# Altium PCB PCB.PcbDoc
Units mil, origin at the board's own origin, x right, y up, seen from the top; angles counter-clockwise.
Board outline 2115 x 1365 mil, 4 copper layers (Top Layer, Layer 1, Layer 2, Bottom Layer), stack 59.391 mil thick; 38 components, 21 nets, 114 pads, 51 vias.
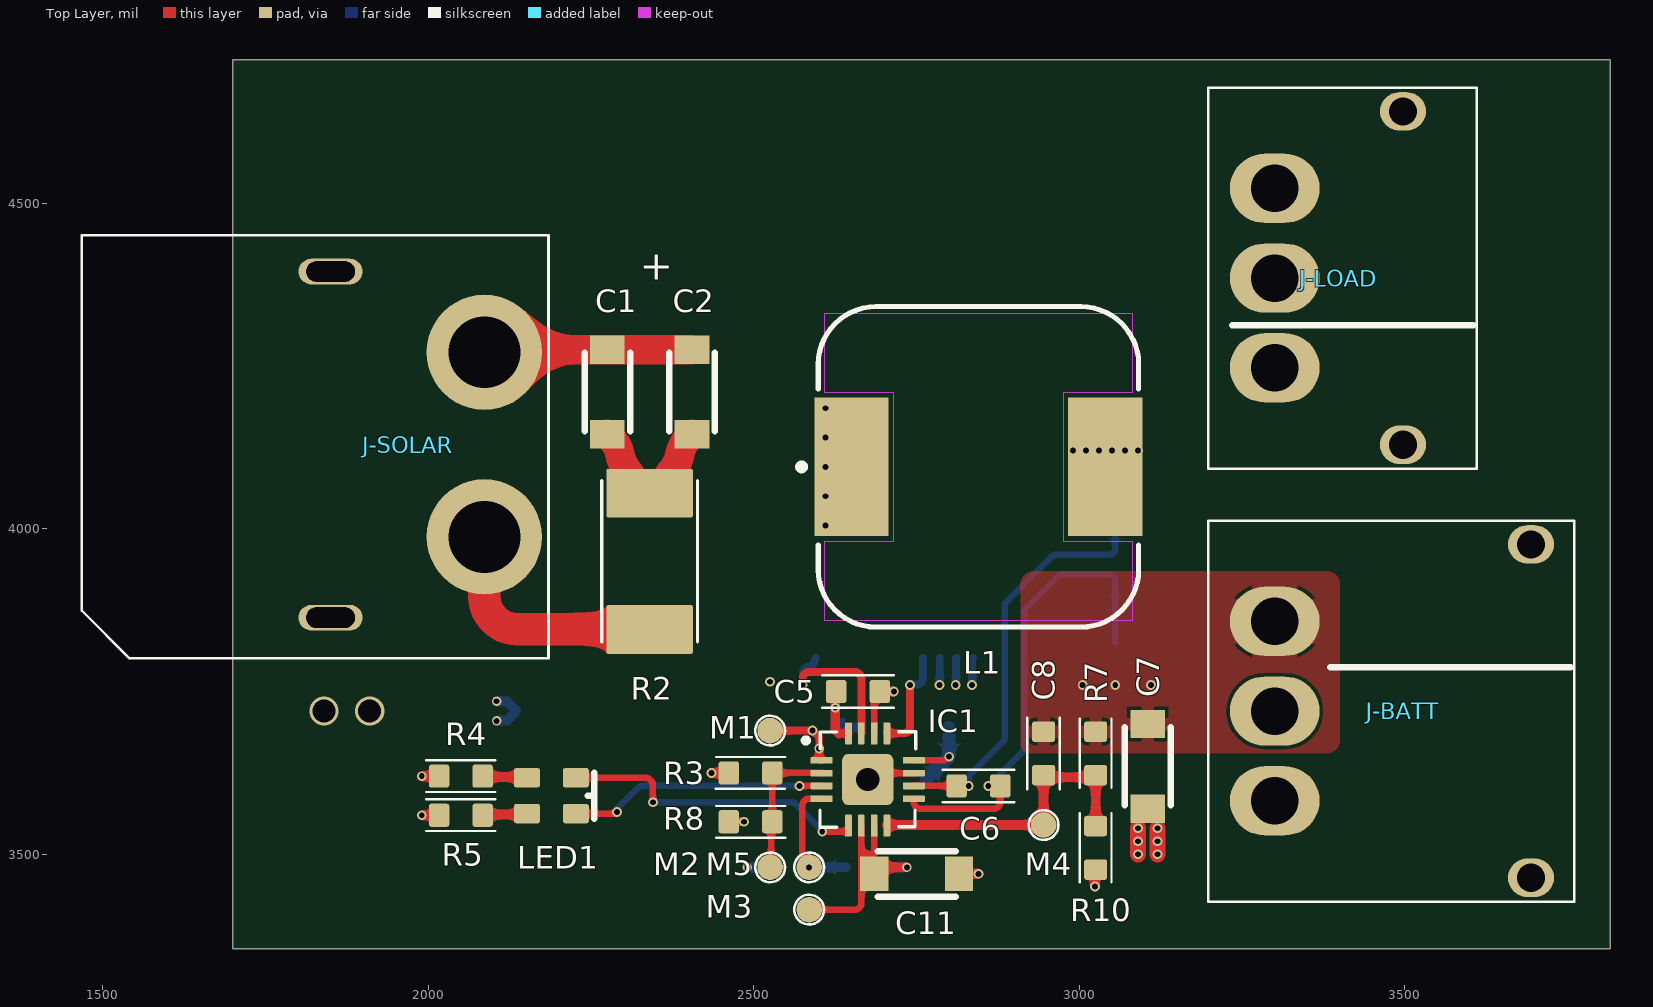
[diagram p0: Top Layer view]
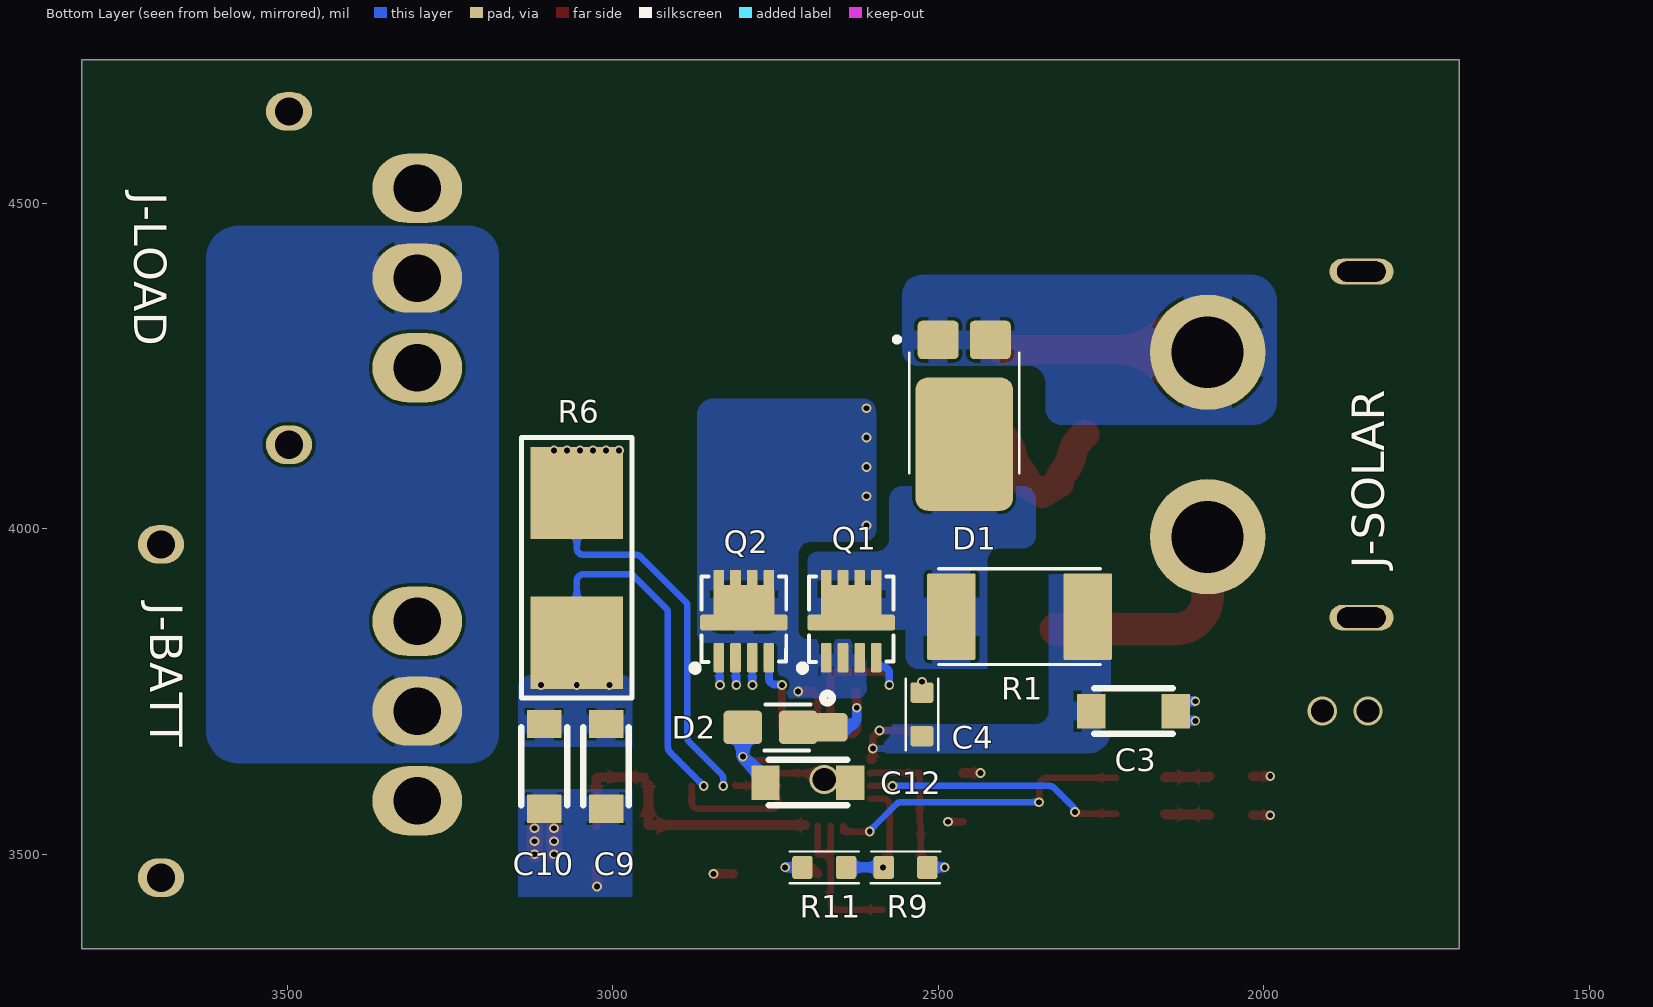
[diagram p1: Bottom Layer view, seen from below]
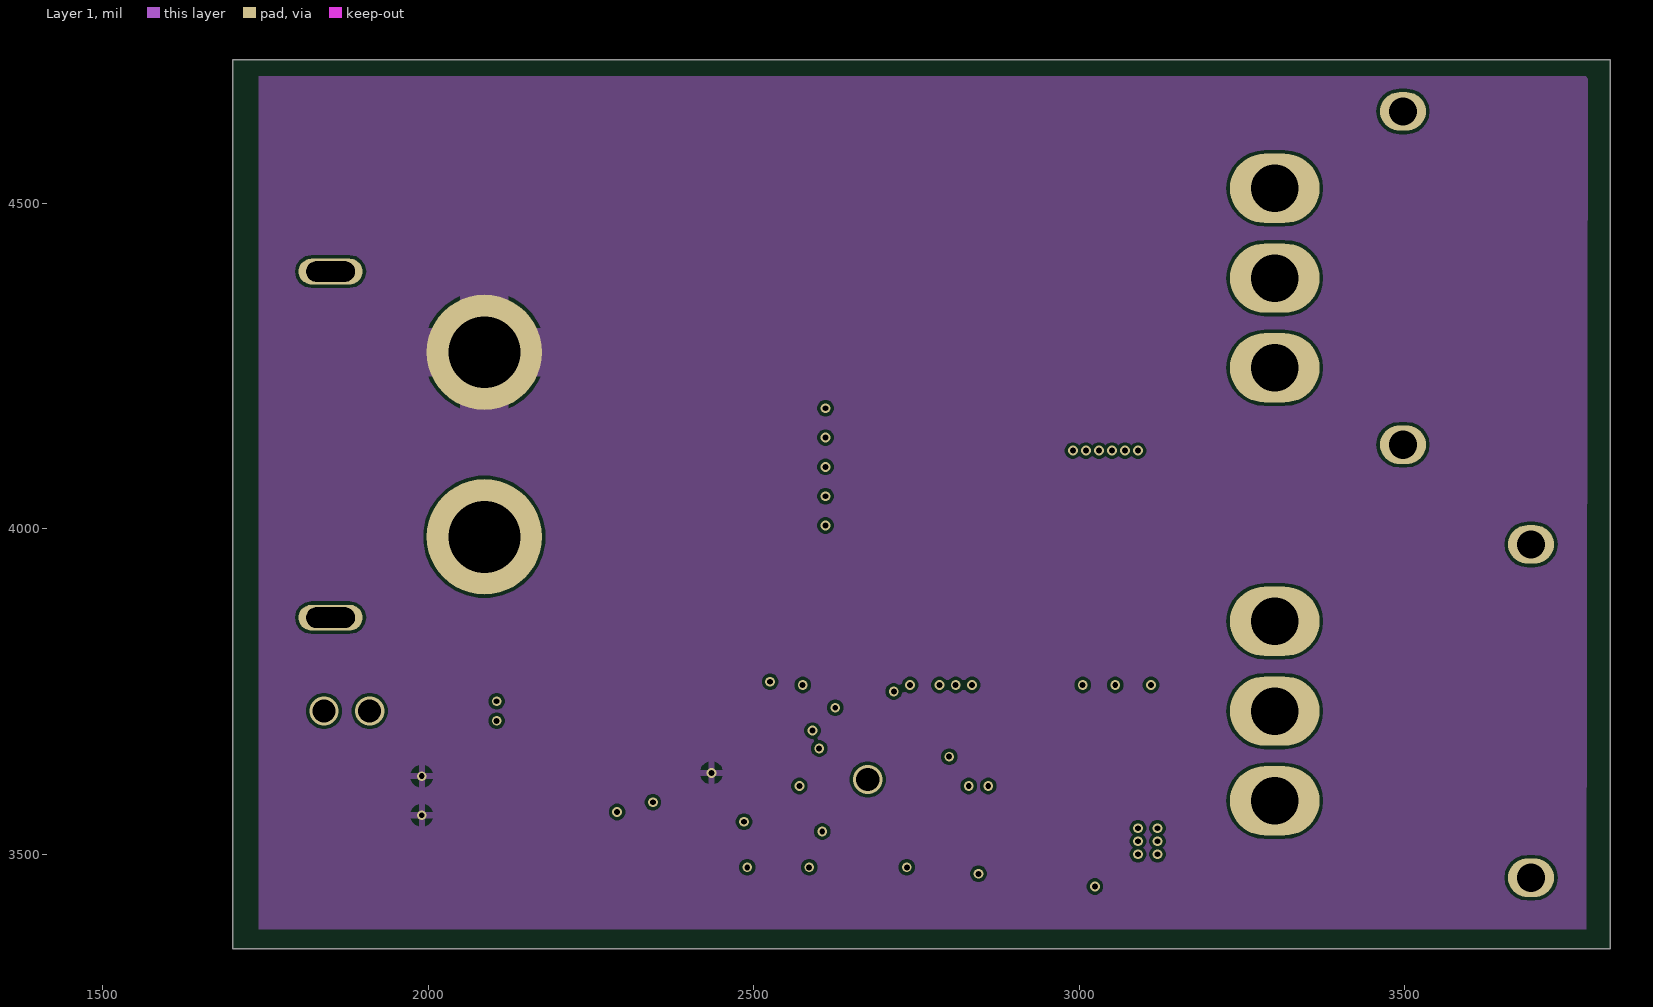
[diagram p2: Layer 1]
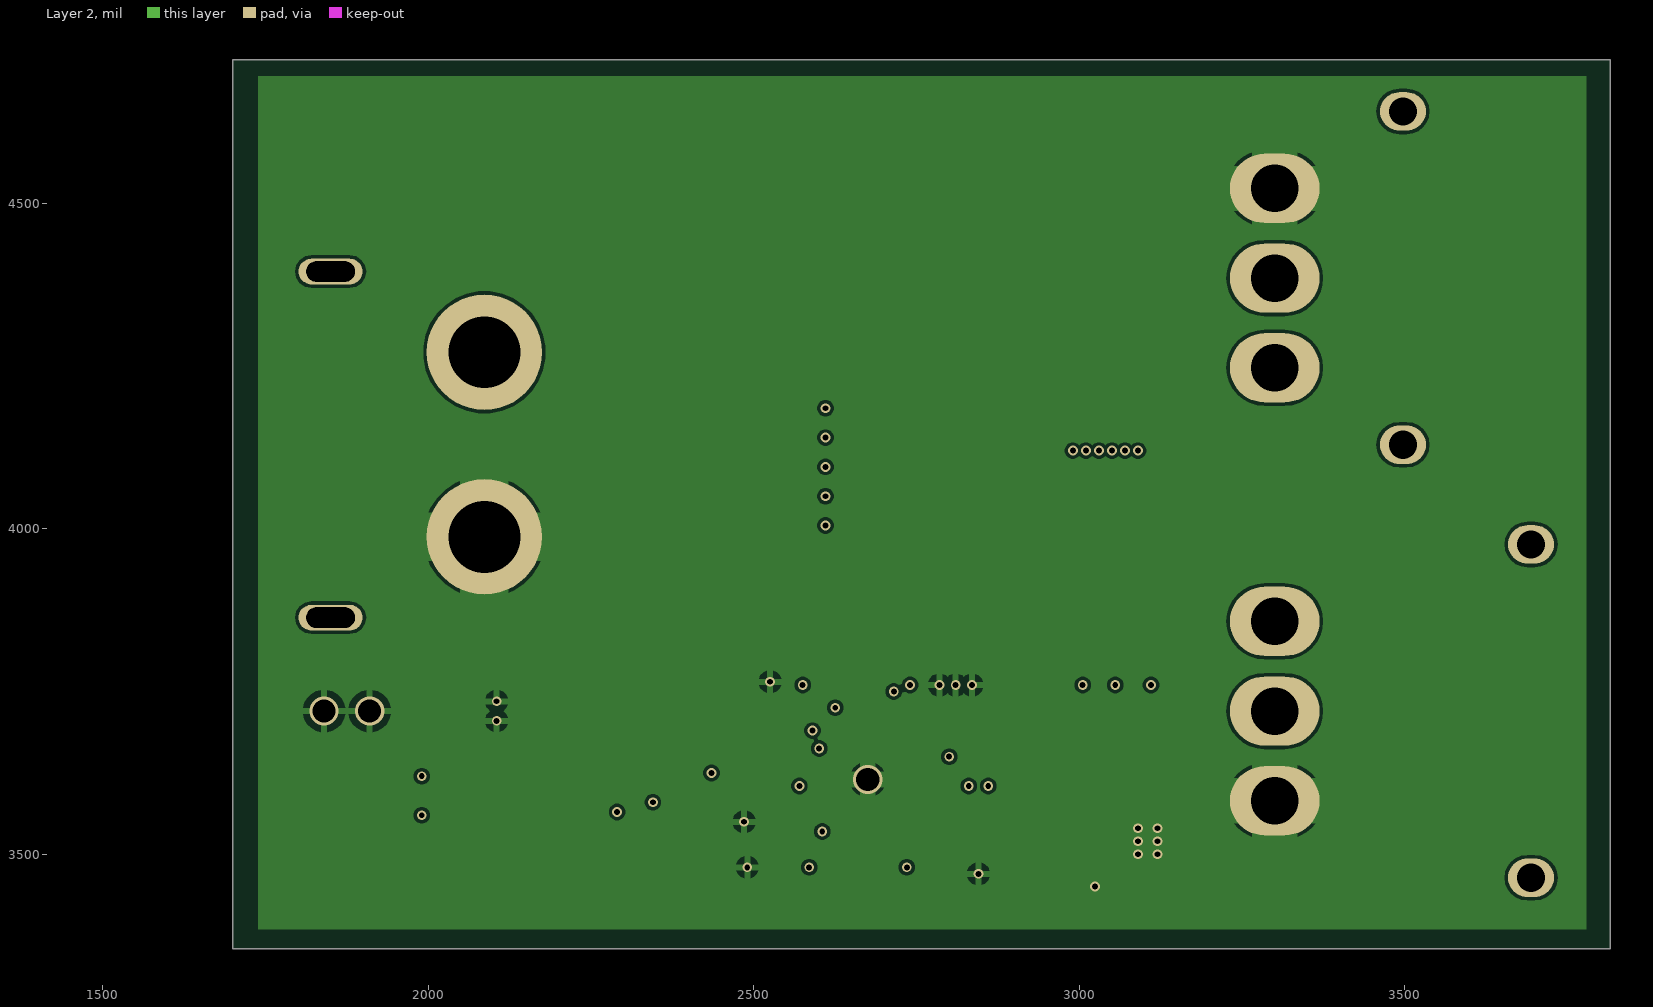
[diagram p3: Layer 2]

## Layer stack, top to bottom
Top Solder: solder mask 0.4, Solder Resist, Dk 3.5
Top Layer: signal copper 0.7087
Dielectric 2: prepreg 2.6823, Prepreg-1080, Dk 4.3
Dielectric 4: prepreg 2.6823, Prepreg-1080, Dk 4.3
Layer 1: signal copper 1.378
Dielectric 1: core 44.4882, FR4-CORE, Dk 4.6
Layer 2: signal copper 1.378
Dielectric 5: prepreg 2.6823, Prepreg-1080, Dk 4.3
Dielectric 3: prepreg 2.6823, Prepreg-1080, Dk 4.3
Bottom Layer: signal copper 0.7087
Bottom Solder: solder mask 0.4, Solder Resist, Dk 3.5

## Board outline
1700,3355 3815,3355 3815,4720 1700,4720

## Design rules (kind name [scope] priority, off if disabled: settings)
Clearance [All] p1: gap=4.92 ignorepadtopadclearanceinfootprint=FALSE
HoleSize [All] p1: absolutevalues=TRUE maxlimit=200 minlimit=7.87 maxpercent=80.000 minpercent=20.000
MinimumSolderMaskSliver [All] p1: minsoldermaskwidth=3
PolygonConnect [All] p1: connectstyle=Relief reliefconductorwidth=10 reliefentries=4 polygonreliefangle="90 Angle" airgapwidth=10
RoutingVias [All] p1: holewidth=28 width=50 viastyle="Through Hole" minholewidth=28 minwidth=50 maxholewidth=28 maxwidth=50
SilkToSolderMaskClearance [IsPad] p1: minsilkscreentomaskgap=3 clearancetoexposedcopper=TRUE
SolderMaskExpansion [All] p1: expansion=2 istentingtop=FALSE
Width [All] p1: maxlimit=70 minlimit=8 preferedwidth=12
27 further rules are at their usual default settings.

## Components (designator, comment, footprint, x,y, rotation, side; value= is the part's Value field where it differs from the comment)
C1 "C1206C105K5RACTU" C1206_medium 2275,4210 r270 top value=1u
C2 "C1206C105K5RACTU" C1206_medium 2405,4210 r270 top value=1u
C3 "C1206C105K5RACTU" C1206_medium 2200,3720 r0 bottom value=1u
C4 "06035C104K4Z2A" C0603 2525,3715 r270 bottom value=100n
C5 "06035C104K4Z2A" C0603 2660,3750 r0 top value=100n
C6 "06035C104K4Z2A" C0603 2845,3605 r0 top value=100n
C7 "C1206C105K5RACTU" C1206_medium 3105,3635 r90 top value=1u
C8 "CC0603JRNPO9BN220" C0603 2945,3655 r270 top value="22p NP0"
C9 "C1206C105K5RACTU" C1206_medium 3010,3635 r90 bottom value=1u
C10 "C1206C105K5RACTU" C1206_medium 3105,3635 r90 bottom value=1u
C11 "C1206C105K5RACTU" C1206_medium 2750,3470 r0 top value=1u
C12 "C1206C105K5RACTU" C1206_medium 2700,3610 r0 bottom value=1u
D1 "PMEG045V100EIPE-QZ" SOT1289 2465,4170 r180 bottom value=PMEG045V100E
D2 "NRVB0540T1G" SOD123HP 2735,3695 r180 bottom
IC1 "BQ24650" QFN50P350X350X100-17N 2674.88,3614.88 r0 top
J-BATT "MR30PW-M" MR30PW-M 3300,3582.2 r180 top
J-LOAD "MR30PW-FB" MR30PW-FB 3300,4247.2 r180 top
J-SOLAR "XT60-PCB-M" XT60-PCB-M 2086.22,4270.98 r0 top
L1 "10uH, 7.1A" WE-PD_1210 2845,4095 r270 top
LED1 "150080RV54050" LED-GREEN-RED 2190,3590 r270 top value="Green Red"
M1 "TP" "Pad 1mm SMD" 2525,3690 r0 top
M2 "TP" "Pad 1mm SMD" 2525,3480 r0 top
M3 "TP" "Pad 1mm SMD" 2585,3415 r0 top
M4 "TP" "Pad 1mm SMD" 2945,3545 r90 top
M5 "TP" "Pad 1mm SMD" 2585,3480 r90 top
Q1 "FDMC86102L" PowerPak1212_LFPAK33 2633.4,3861 r180 bottom
Q2 "FDMC86102L" PowerPak1212_LFPAK33 2798.4,3861 r180 bottom
R1 "352210RFT" RESC6331X70N 2375,3865 r180 bottom value=10R
R2 "352210RFT" RESC6331X70N 2340,3950 r270 top value=10R
R3 "CRGCQ0603F470K" R0603 2495,3625 r0 top value=470K
R4 "CRGP0603F10K" R0603 2050,3620 r0 top value=10K
R5 "CRGP0603F10K" R0603 2050,3560 r0 top value=10K
R6 "CS121WF250MT2E" Shunt_2512 3055,3940 r270 bottom value=0R025
R7 "SFR03EZPF5603" R0603 3025,3655 r270 top value=560K
R8 "CRGCQ0603F33K" R0603 2495,3550 r180 top value=33K
R9 "SFR03EZPF5101" R0603 2675,3480 r180 bottom value=5K1
R10 "RC0603FR-07100KL" R0603 3025,3510 r270 top value=100k
R11 "CRGCQ0603F33K" R0603 2550,3480 r180 bottom value=33K

## Footprints (in the part's own frame and the unit in brackets; to place one, negate y for a bottom-side part, rotate by r counter-clockwise, add the part's x,y. Pads: shape width x height; smd on the part's side, far side on the other; paste and mask are expansions set on the pad)
C0603 [mm]
  rrect25% 0.8x0.9 smd: 1(-0.85,0) 2(0.85,0)
  silkscreen extent -1.4,-0.64 1.4,0.64, body extent -0.8,-0.4 0.8,0.4, height 0.6
C1206_medium [mm]
  rect 1.1x1.35 smd: 1(-1.65,0) 2(1.65,0)
  silkscreen extent -1.52,-0.89 1.52,0.89, body extent -1.6,-0.8 1.6,0.8, height 1.26
LED-GREEN-RED [mil]
  rrect25% 30x40 smd mask+2: 1(27.56,36.69) 2(-27.56,36.69) 3(-27.56,-38.31) 4(27.56,-38.31)
  silkscreen extent -35,55 35,65, body extent -25,-39 25,39, height 18
MR30PW-FB [mm]
  oval 3.5x2.7 hole 1.85: 1(0,0) 2(0,-3.5) 3(0,-7)
  oval 1.8x1.5 hole 1.1: 5(-5,3) 5(-5,-10)
  silkscreen extent -7.87,-10.92 2.6,3.94, body extent -13.62,-11.13 0.83,4.27, height 5.3
MR30PW-M [mm]
  oval 3.5x2.7 hole 1.85: 1(0,-7) 2(0,-3.5) 3(0,0)
  oval 1.8x1.5 hole 1.1: 5(-10,3) 5(-10,-10)
  silkscreen extent -11.68,-10.92 2.6,3.94, body extent -12.95,-11.13 1,4.27, height 5.35
"Pad 1mm SMD" [mm]
  round 1 smd mask+0.051: 1(0,0)
  silkscreen extent -0.58,-0.58 0.58,0.58
PowerPak1212_LFPAK33 [mil]
  rrect25% 16.5x45 smd mask+2: 1(-38.4,-59) 2(-12.8,-59) 3(12.8,-59) 4(38.4,-59)
  rrect25% 16.5x34 smd mask+2: 5(-38.4,59) 5(-12.8,59) 5(12.8,59) 5(38.4,59)
  rrect25% 134x24 smd mask+2: 5(0,-5)
  rrect25% 93.31x69.29 smd mask+2: 5(0.01,17.78)
  silkscreen extent -77,-77 65,65, body extent -65,-65 65,65, height 44
QFN50P350X350X100-17N [mm]
  rrect25% 0.86x0.26 smd: 1(-1.8,0.75) 2(-1.8,0.25) 3(-1.8,-0.25) 4(-1.8,-0.75) 9(1.8,-0.75) 10(1.8,-0.25) 11(1.8,0.25) 12(1.8,0.75)
  rrect25% 0.26x0.86 smd: 5(-0.75,-1.8) 6(-0.25,-1.8) 7(0.25,-1.8) 8(0.75,-1.8) 13(0.75,1.8) 14(0.25,1.8) 15(-0.25,1.8) 16(-0.75,1.8)
  rrect25% 2x2 smd paste-2: 17(0,0)
  silkscreen extent -2.51,-1.86 1.87,1.86, body extent -1.85,-1.85 1.85,1.85, height 1.4
R0603 [mm]
  rrect25% 0.8x0.9 smd: 1(-0.85,0) 2(0.85,0)
  silkscreen extent -1.36,-0.62 1.35,0.62, body extent -0.8,-0.4 0.8,0.4, height 0.4
RESC6331X70N [mm]
  rrect7% 1.9x3.37 smd: 1(-2.66,0) 2(2.66,0)
  silkscreen extent -3.15,-1.87 3.15,1.87, body extent -3.15,-1.6 3.15,1.6, height 0.66
Shunt_2512 [mm]
  rect 3.6x3.6 smd: 1(-2.921,0) 2(2.921,0)
  silkscreen extent -5.08,-2.16 5.08,2.16, body extent -3.09,-1.57 3.21,1.63, height 0.66
SOD123HP [mm]
  rrect25% 1.5x1.3 smd paste+0 mask+0.051: 1(-1.651,0) 2(0.508,0)
  rrect25% 1.3x1.1 smd paste+0 mask+0.051: 2(1.778,0)
  silkscreen extent -0.81,-0.91 1.83,1.32, body extent -1.72,-0.89 1.98,0.89, height 0.9
SOT1289 [mil]
  rrect25% 62.99x59.06 smd: 1(-35,120) 2(45,120)
  rrect25% 149.61x204.72 smd: 3(5,-40)
  silkscreen extent -102,-85 90,125, body extent -83,-121 93,135, height 30
WE-PD_1210 [mm] "SMT Shielded Power Inductor, 2-leads, body 12x12mm"
  rect 5.4x2.9 smd: 1(0,-4.95) 2(0,4.95)
  Top Layer keep-out region: -6,6 -2.9,6 -2.9,3.3 2.9,3.3 2.9,6 6,6 6,-6 2.9,-6 2.9,-3.3 -2.9,-3.3 -2.9,-6 -6,-6
  silkscreen extent -6.25,-7.02 6.25,6.25, body extent -6,-6 6,6, height 9.46
XT60-PCB-M [mm]
  round 4.5 hole 2.8: 1(0,0) 2(0,-7.2)
  oval 2.5x1 hole 0.8 slot 1.9 at 0 deg: 3(-6,-10.35) 4(-6,3.15)
  silkscreen extent -15.7,-11.94 2.5,4.57, body extent -15.2,-11.31 3,4.19, height 8.41

## Part data
C1 C2 C3 C7 C9 C10 C11 C12: library part CC_1206_X7R_105, "Ceramic Capacitor X7R 50V", Supplier Part Number 1=81-GCJ31MR71H105KA2L, Supplier 1=Mouser, Supplier 2=Digi-Key, Supplier 3=Farnell, Supplier Part Number 2=490-5810-1-ND, Supplier Part Number 3=2781416
C4 C5 C6: library part CC_0603_X7R_104, "Ceramic Capacitor X7R 50V", Manufacturer Part Number="100n/50V X7R C0603", Supplier Part Number 1=581-06035C104K4Z2A, Category="Capacitors CERA SMD", Component Type=Capacitors, Main=Capacitors, Part Number="100n/50V X7R C0603", SMD/THD=SMD, Status=A, Supplier 1=Mouser, Supplier 2=Farnell, Supplier Part Number 2=1833843
C8: library part CC_0603_NP0_220, "Ceramic Capacitor NP0 50V", Part Number="22p/50V NPO C0603", Supplier Part Number 1=603-CC603JRNPO9BN220, Category="Capacitors CERA SMD", Component Type=Capacitors, Main=Capacitors, SMD/THD=SMD, Status=A, Supplier 1=Mouser, Supplier 2=Farnell, Supplier 3=TME, Supplier Part Number 2=722005, Supplier Part Number 3=CC0603JRNPO9220
D1: library part PMEG045V100E, "Planar Low VF Schottky barrier rectifier 45V/10A", Manufacturer=NXP, Part Number=PMEG4005AEA, Supplier Part Number 1=771-PMEG4005AESFYL, Category=Schottky, ComponentLink1Description=Datasheet, ComponentLink1URL=http://www.farnell.com/datasheets/684565.pdf, Main=Diodes, SMD/THD=SMD, Status=A, Supplier 1=Mouser, Supplier 2=Digi-Key, Supplier 3=Farnell, Supplier Part Number 2=1727-2295-1-ND, Supplier Part Number 3=2498560
D2: "Schottky Diode 40V, 500mA", Supplier Part Number 1=863-NRVB0540T1G, Category=Schottky, Main=Diodes, SMD/THD=SMD, Status=A, Supplier 1=Mouser, Supplier 2=Farnell, Supplier Part Number 2=2723913
IC1: "Charge Management: Lead Acid, Lithium Iron Phosphate (LiFePO4), Lithium-ion, Lithium Polymer / + 85°C/ -40° C", Supplier Part Number 1=595-BQ24650RVAT, Supplier 1=Mouser, Supplier 2=Digikey, Supplier Part Number 2=296-27699-1-ND
J-BATT J-LOAD: "Connector", Supplier 1=TME
  J-BATT: Supplier Part Number 1=MR30PW-M
  J-LOAD: Supplier Part Number 1=MR30PW-FB
J-SOLAR: "XT60 Connector", Manufacturer_Name=Amass, Manufacturer_Part_Number=XT30PB, Datasheet Link=https://www.tme.eu/Document/4acc913878197f8c2e30d4b8cdc47230/XT30UPB%20SPEC.pdf, Height=10.7mm
L1: library part 7447709100, "WE-PD SMT Power Inductor, size 1210, 10uH, 7.1A, 21mOhm", Case/Size Code=1210, DC Resistance=13mOhm, DC Resistance Max=21mOhm, Inductance=10uH, Manufacturer="Wurth Elektronik", Max Operating Temperature=125°C, Min Operating Temperature=-40°C, Rated Current=7.1A, Saturation Current=10.5A, Self Resonant Frequency=21MHz, Category="Power Inductors", ComponentLink1Description="Website Link", ComponentLink1URL=https://www.we-online.com/redexpert/article/7447709100?ad, ComponentLink2Description="Datasheet Link", ComponentLink2URL=https://www.we-online.com/redexpert/spec/7447709100?ad, Height=10mm, Length=12mm, Manufacturer Part Number=7447709100, Match Code=WE-PD, Mount="Surface Mount", Packaging="Tape and Reel", Type=Standard, Width=12mm
LED1: "SMD Bi-Color LED Green Red", Manufacturer="Wurth Elektronik", Supplier Part Number 1=710-150080RV54050, Category=LED, ComponentLink1Description=Datasheet, ComponentLink1URL=https://cz.mouser.com/datasheet/2/445/150080RV54050-1838969.pdf, Main=Diodes, Part Number=150080RV54050, SMD/THD=SMD, Status=A, Supplier 1=Mouser, Supplier 2=Digi-Key, Supplier Part Number 2=732-150080RV54050CT-ND
M1 M2 M3 M4 M5: library part TP_PCB, "Test Point", Category=Pads_Pins_Measure_Points, Component Type=Mechanical, Main=Mechanical, Stock number=--------
Q1 Q2: "Single N-Channel 100V, 18A, 23mOhm", Manufacturer="ON Semiconductor / Fairchild", Supplier Part Number 1=512-FDMC86102L, Category=N-MOS, Component Type=Transistors, ComponentLink1Description=Datasheet, ComponentLink1URL=http://www.farnell.com/datasheets/1837750.pdf, Main=Transistors, Manufacturer Part Number=FDMC86102L, Part Number=FDMC86102L, SMD/THD=SMD, Status=A, Supplier 1=Mouser, Supplier 2=Digi-Key, Supplier Part Number 2=FDMC86102LFSCT-ND
R1 R2: library part CR_2512_10R, "Resistor 1%, 3W, 250V", Supplier Part Number 1=279-352210RFT, Category="Resistors SMD", Component Type=Resistors, Main=Resistors, SMD/THD=SMD, Status=A, Supplier 1=Mouser, Supplier 2=Digi-Key, Supplier Part Number 2=A121123CT-ND
R3: library part CR_0603_474, "Resistor 1%, 0.1W, 75V", Supplier Part Number 1=279-CRGCQ0603F470K, Category="Resistors SMD", Component Type=Resistors, Main=Resistors, SMD/THD=SMD, Status=A, Supplier 1=Mouser, Supplier 2=Digi-Key, Supplier 3=TME, Supplier Part Number 2=A129720CT-ND, Supplier Part Number 3=CRGCQ0603F470K
R4 R5: library part CR_0603_103, "Resistor 1%, 0.1W, 75V", Supplier Part Number 1=279-CRGP0603F10K, Category="Resistors SMD", Component Type=Resistors, Main=Resistors, SMD/THD=SMD, Status=A, Supplier 1=Mouser, Supplier 2=Digi-Key, Supplier 3=Farnell, Supplier Part Number 2=A130428CT-ND, Supplier Part Number 3=2861046
R6: library part SHUNT_2512_0R025, "Current Sense Resistor 1%, 1W", Supplier Part Number 1=CS2512N4-0R025-1%, Category="Resistors SMD", Component Type=Resistors, Main=Resistors, SMD/THD=SMD, Status=A, Supplier 1=TME
R7: library part CR_0603_564, "Resistor 1%, 0.1W, 75V", Supplier Part Number 1=755-SFR03EZPF5603, Category="Resistors SMD", Component Type=Resistors, Main=Resistors, SMD/THD=SMD, Status=A, Supplier 1=Mouser, Supplier 2=Digi-Key, Supplier Part Number 2=511-SFR03EZPF5603CT-ND
R8 R11: library part CR_0603_333, "Resistor 1%, 0.1W, 75V", Supplier Part Number 1=A129706CT-ND, Category="Resistors SMD", Component Type=Resistors, Main=Resistors, SMD/THD=SMD, Status=A, Supplier 1=Digi-Key, Supplier 2=Mouser, Supplier 3=TME, Supplier Part Number 2=279-CRGCQ0603F33K, Supplier Part Number 3=CRGCQ0603F33K
R9: library part CR_0603_512, "Resistor 1%, 0.1W, 75V", Supplier Part Number 1=755-SFR03EZPF5101, Category="Resistors SMD", Component Type=Resistors, Main=Resistors, SMD/THD=SMD, Status=A, Supplier 1=Mouser, Supplier 2=Digi-Key, Supplier Part Number 2=511-SFR03EZPF5101CT-ND
R10: library part CR_0603_104, "Resistor 1%, 0.1W, 75V", Supplier Part Number 1=603-RC0603FR-07100KL, Category="Resistors SMD", Component Type=Resistors, Main=Resistors, SMD/THD=SMD, Status=A, Supplier 1=Mouser, Supplier 2=Farnell, Supplier 3=TME, Supplier Part Number 2=9238727, Supplier Part Number 3=RC0603FR-07100K

## Via types
v1: diameter 15, hole 9, Top Layer to Bottom Layer, tented both sides, 46 vias
v2: diameter 45, hole 35.43, Top Layer to Bottom Layer, 2 vias
v3: diameter 15, hole 9, Top Layer to Bottom Layer, 2 vias
v4: diameter 45, hole 35.43, Top Layer to Bottom Layer, tented both sides, 1 vias

## Nets (pads, with @x,y where several pads share a name; then routed paths per layer and width w, separated by ;. In a path a pad name is that pad's centre, name@x,y a point inside that pad or via, vN(x,y) a via of type N, cw(c..) or ccw(c..) an arc to the next point about the centre after c; other vN are vias at no path point)
GND: C3.1 C4.1 C7.1 C9.1 C10.1 C11.2 C12.1 IC1.11 IC1.17 J-BATT.3 J-LOAD.3 J-SOLAR.2 Q2.1 Q2.2 Q2.3 R2.2 R8.2 R10.2 R11.2 | length 940.1
  Top Layer w10: v4(2675,3615) 2684.84,3624.84 IC1.11@2745.87,3624.84
  Top Layer w12: R8.2 v1(2485,3550)
  Top Layer w15: C11.2 v1(2845,3470) ; v1(3023.81,3450.63) 3023.81,3475.35 R10.2 ; v1(3090,3540) 3090,3555.89 3104.15,3570.04 C7.1 3105.85,3570.04 3120,3555.89 v1(3120,3540)
  Top Layer w25: v1(3090,3500) v1(3090,3520) v1(3090,3540) ; v1(3120,3500) v1(3120,3520) v1(3120,3540)
  Top Layer w50: J-SOLAR.2 2086.22,3895.94 ccw(c2136.22,3895.94) 2136.22,3845.94 R2.2@2319.34,3845.94
  Bottom Layer w12: v1(2785,3760) 2785,3760.48 2785.6,3761.08 Q2.3 ; v1(2810,3760) 2810.34,3760.34 2810.34,3801.14 Q2.2 ; v1(2835,3760) 2835.34,3760.34 2835.34,3800.54 Q2.1
  Bottom Layer w15: v1(2105,3705) 2120.89,3705 C3.1 2135.04,3720.85 2120.89,3735 v1(2105,3735) ; v1(2490,3480) R11.2
  Bottom Layer w75: J-SOLAR.2 2113.87,3987.52 J-SOLAR.2@2130.54,4004.19
  other v1: 2525,3765
  other v2: 1840,3720 1910,3720
NetC1_1: C1.1 C2.1 D1.1 D1.2 J-SOLAR.1 R3.1 R4.1 R5.1 | length 397.1
  Top Layer w15: v1(1990,3560) R5.1 ; v1(1990,3620) R4.1 ; v1(2435,3625) R3.1
  Top Layer w45: J-SOLAR.1 cw(c2104.72,4229.96) 2104.62,4274.96 C2.1@2403.1,4274.96
NetC1_2: C1.2 C2.2 R2.1 | length 254
  Top Layer w15: R2.1@2318.98,4054.72 R2.1
  Top Layer w45: C1.2 2281.84,4138.2 cw(c2250,4106.4) 2293.44,4118.16 2296.56,4106.61 ccw(c2340,4118.36) 2305.68,4089.26 2307.6,4086.99 cw(c2286.68,4069.26) 2314.1,4069.63 R2.1 2365.56,4069.63 cw(c2392.98,4068.92) 2373.21,4087.93 2373.7,4088.44 ccw(c2341.26,4119.62) 2384.7,4107.87 2387.82,4119.42 cw(c2431.26,4107.66) 2399.42,4139.46 C2.2
NetC3_2: C3.2 C4.2 IC1.1 M1.1 R1.2 | length 118
  Top Layer w12: M1.1 v1(2590,3690) 2600.34,3679.66 2600.34,3645.41 2601.22,3644.53 IC1.1@2604.13,3644.53
  other v1: 2600.34,3662.53
NetC5_1: C5.1 D2.2 IC1.16 | length 144.9
  Top Layer w12: 2630.75,3685.75 IC1.16
  Top Layer w15: C5.1 2625,3737.28 v1(2625,3725) 2625,3691.5 2630.75,3685.75
  Bottom Layer w15: v1(2625,3725) 2625,3710 ccw(c2640,3710) 2640,3695 D2.2@2665,3695
NetC5_2: C5.2 IC1.14 L1.1 Q1.1 Q1.2 Q1.3 Q2.5 | length 89.2
  Top Layer w10: IC1.14@2684.84,3685.87 2684.96,3685.98 2684.96,3741.5 C5.2
  Top Layer w15: C5.2 v1(2715,3750)
  other v1: 2610,4005 2610,4050 2610,4095 2610,4140 2610,4185
NetC6_1: C6.1 IC1.10 L1.2 R6.1 | length 660.5
  Top Layer w10: IC1.10@2745.87,3605.16 2745.94,3605.08 2811.46,3605.08 C6.1 C6.1@2811.54,3606.97
  Bottom Layer w10: v3(2830,3605) 2830,3615.9 cw(c2840,3615.86) 2832.89,3622.89 2882.09,3672.09 ccw(c2875,3679.14) 2885,3679.14 2885,3880.86 cw(c2895,3880.86) 2887.93,3887.93 2957.07,3957.07 cw(c2964.14,3950) 2964.14,3960 3045,3960 ccw(c3045,3970) 3055,3970 R6.1
  other v1: 2990,4120 3010,4120 3030,4120 3050,4120 3070,4120 3090,4120
NetC6_2: C6.2 C7.2 C8.1 C9.2 C10.2 IC1.9 J-BATT.1 R6.2 R7.1 | length 729.5
  Top Layer w10: IC1.9 2745.75,3580 ccw(c2755.75,3580) 2755.75,3570 2868.51,3570 ccw(c2868.46,3580) 2878.46,3580 C6.2
  Bottom Layer w10: v3(2860,3605) 2912.09,3657.09 ccw(c2905,3664.14) 2915,3664.14 2915,3870.9 cw(c2925,3870.86) 2917.93,3877.93 2967.07,3927.07 cw(c2974.14,3920) 2974.14,3930 3044.99,3930 cw(c3044.99,3920) 3054.99,3920 R6.2
  other v1: 3005,3760 3055,3760 3110,3760
NetC8_2: C8.2 IC1.8 M4.1 R7.2 R10.1 | length 464.2
  Top Layer w10: IC1.8 2704.41,3544.88 IC1.8@2704.53,3545 ; C8.2@2945,3606.54 C8.2@2955,3616.54
  Top Layer w15: IC1.8@2704.53,3545 M4.1 C8.2@2945,3606.54 ; C8.2@2951.73,3618.27 3023.27,3618.27 3025,3616.54 R10.1
NetC11_1: C11.1 IC1.6 IC1.7 M3.1 R9.1 | length 350.3
  Top Layer w10: M3.1 2655.16,3415 ccw(c2655.16,3425) 2665.16,3425 2665.16,3500 ; IC1.6@2665.16,3544.13 IC1.6 2665.16,3543.9 2665.16,3500 ; IC1.7@2684.84,3544.13 2684.84,3500.16 2684.68,3500 2665.16,3500
  Top Layer w15: C11.1 2695.04,3480 v1(2735,3480)
  Bottom Layer w15: R9.1@2708.46,3478.03 2710.43,3480 v1(2735,3480)
NetC12_2: C12.2 D2.1 IC1.12 | length 156.1
  Top Layer w10: IC1.12 2793.39,3644.41 2798.98,3650 v1(2800,3650)
  Bottom Layer w20: C12.2 2764.96,3614.92 v1(2800,3650) ; v1(2800,3650) D2.1
NetD1_3: D1.3 Q1.5 R1.1
NetIC1_2: IC1.2 M2.1 R3.2 R8.1 | length 222.2
  Top Layer w10: M2.1 2526.73,3481.73 2526.73,3546.3 2528.46,3548.03 R8.1 R3.2 2528.54,3624.92 2604.06,3624.92 IC1.2@2604.13,3624.84
NetIC1_3: IC1.3 LED1.1 | length 397.2
  Top Layer w10: LED1.1 2286.42,3562.44 2288.98,3565 v1(2290,3565) ; v1(2570,3605) 2570.08,3605.08 2604.06,3605.08 IC1.3@2604.13,3605.16
  Bottom Layer w10: v1(2290,3565) 2290,3565.9 cw(c2300,3565.86) 2292.89,3572.89 2322.09,3602.09 cw(c2329.14,3595) 2329.14,3605 v1(2570,3605)
NetIC1_4: IC1.4 M5.1 R9.2 R11.1 | length 190.8
  Top Layer w10: v1(2585,3480) 2579.38,3485.62 2579.38,3495.41 2577.57,3497.22 cw(c2584.65,3504.29) 2574.65,3504.29 2574.65,3575.35 cw(c2584.65,3575.35) 2584.65,3585.35 IC1.4
  Bottom Layer w15: v1(2585,3480) R9.2
NetIC1_5: IC1.5 LED1.2 | length 479.7
  Top Layer w10: LED1.2 2333.42,3617.56 cw(c2333.42,3607.56) 2340.47,3614.65 2342.09,3613.03 cw(c2335,3605.98) 2345,3606.02 v1(2345,3580) ; v1(2605,3535) 2645.35,3535 2645.47,3535.12 IC1.5@2645.47,3544.13
  Bottom Layer w10: v1(2345,3580) 2557.16,3580 cw(c2557.16,3570) 2564.25,3577.05 2605.87,3535.43 cw(c2598.77,3528.38) v1@2606.27,3535
NetIC1_13: IC1.13 Q2.4 | length 162.4
  Top Layer w12: IC1.13@2704.53,3685.87 2730,3685.87 ccw(c2730,3695.87) 2740,3695.87 v1(2740,3760)
  Bottom Layer w12: v1(2740,3760) cw(c2743.73,3750.72) 2743.69,3760.72 2750,3760.72 ccw(c2750,3770.72) 2760,3770.72 Q2.4
NetIC1_15: IC1.15 Q1.4 | length 247.3
  Top Layer w12: v1(2575,3760) 2575,3770.04 cw(c2585,3770) 2584.96,3780 2655.16,3780 cw(c2655.16,3770) 2665.16,3770 IC1.15@2665.16,3685.87
  Bottom Layer w12: v1(2575,3760) 2575,3777.69 cw(c2585,3777.65) 2583.02,3787.45 ccw(c2580.17,3802) 2591.58,3792.53 cw(c2599.24,3786.1) 2591.74,3792.71 Q1.4
NetJ-BATT_2: J-BATT.2 J-LOAD.2
NetLED1_3: LED1.3 R4.2 | length 69.2
  Top Layer w15: R4.2 2084.68,3618.78 2150.47,3618.78 LED1.3
NetLED1_4: LED1.4 R5.2 | length 69.2
  Top Layer w15: R5.2 2084.69,3561.22 2150.47,3561.22 LED1.4
pads on no net: J-BATT.5 J-LOAD.1 J-LOAD.5 J-SOLAR.3 J-SOLAR.4

## Polygon pours and split planes (outlines as drawn)
NetJ-BATT_2 on Bottom Layer "NETJ-BATT_2_L04_P014" (solid, pour order 14): 3623.75,4416.25 3623.75,3688.75 cw(c3575,3688.75) 3575,3640 3220,3640 cw(c3220,3685) 3175,3685 3175,4420 cw(c3220,4420) 3220,4465 3575,4465 cw(c3575,4416.25)
NetC5_2 on Bottom Layer "NETC5_2_L04_P009" (solid, pour order 9): 2625,3740 2750,3740 2750,3825 2855,3825 ccw(c2855,3840) 2870,3840 2870,4175 ccw(c2845,4175) 2845,4200 2615,4200 ccw(c2615,4180) 2595,4180 2595,4000 ccw(c2615,4000) 2615,3980 2695,3980 cw(c2695,3960) 2715,3960 2715,3845 cw(c2700,3845) 2700,3830 2610,3830 2610,3755 ccw(c2625,3755)
NetC6_2 on Bottom Layer "NETC6_2_L04_P012" (solid, pour order 12): 2985,3775 3125,3775 cw(c3125,3755) 3145,3755 3145,3665 2970,3665 2970,3760 cw(c2985,3760)
GND on Bottom Layer "GND_L04_P011" (solid, pour order 11): 2970,3600 3145,3600 3145,3435 2970,3435
NetC1_1 on Bottom Layer "NETC1_1_L04_P008" (solid, pour order 8): 1980,4350 1980,4195 ccw(c2015,4195) 2015,4160 2310,4160 ccw(c2310,4185) 2335,4185 2335,4225 cw(c2360,4225) 2360,4250 2530,4250 ccw(c2530,4275) 2555,4275 2555,4360 ccw(c2525,4360) 2525,4390 2020,4390 ccw(c2020,4350)
NetD1_3 on Bottom Layer "NETD1_3_L04_P007" (solid, pour order 7): 2700,3950 2700,3845 2550,3845 2550,3805 cw(c2530.01,3804.99) 2530,3785 2425,3785 2425,3950 ccw(c2405,3950) 2405,3970 2370,3970 cw(c2370,3990) 2350,3990 2350,4045 cw(c2370,4045) 2370,4065 2555,4065 cw(c2555,4045) 2575,4045 2575,3985 ccw(c2595,3985) 2595,3965 2685,3965 cw(c2685,3950)
NetC3_2 on Bottom Layer "NONET_L-01_P-001" (solid, pour order 6): 2235,3930 2330,3930 2330,3720 ccw(c2350,3720) 2350,3700 2420,3700 2610,3700 2610,3655 2485,3655 2270,3655 cw(c2270,3690) 2235,3690
NetC6_2 on Top Layer "NETC6_2_L01_P010" (solid, pour order 10): 2925,3655 3380,3655 ccw(c3380,3675) 3400,3675 3400,3915 ccw(c3380,3915) 3380,3935 2930,3935 ccw(c2930,3915) 2910,3915 2910,3730 2910,3670 ccw(c2925,3670)
GND on Layer 2 "NONET_L-01_P-001" (solid, pour order 0): 1738.62,4695 3778.62,4695 3778.62,3384.7 1738.62,3384.7
NetC1_1 on Layer 1 "NONET_L-01_P-001" (solid, pour order 1): 1740,4695 1740,3385 3778.82,3385 3780.92,4695

## Text inside footprints (layer, text, board x,y; h text height)
J-SOLAR: Top Overlay "+" at 2325,4382.5 h45